# Altium PCB PA6940.PcbDoc
Units mm, origin at the board's own origin, x right, y up, seen from the top; angles counter-clockwise.
Board outline 34.99 x 16 mm, 2 copper layers (Top Layer, Bottom Layer), stack 1.57 mm thick; 7 components, 10 nets, 38 pads, 75 vias.
Unrouted connection lines stored in the file: 10.
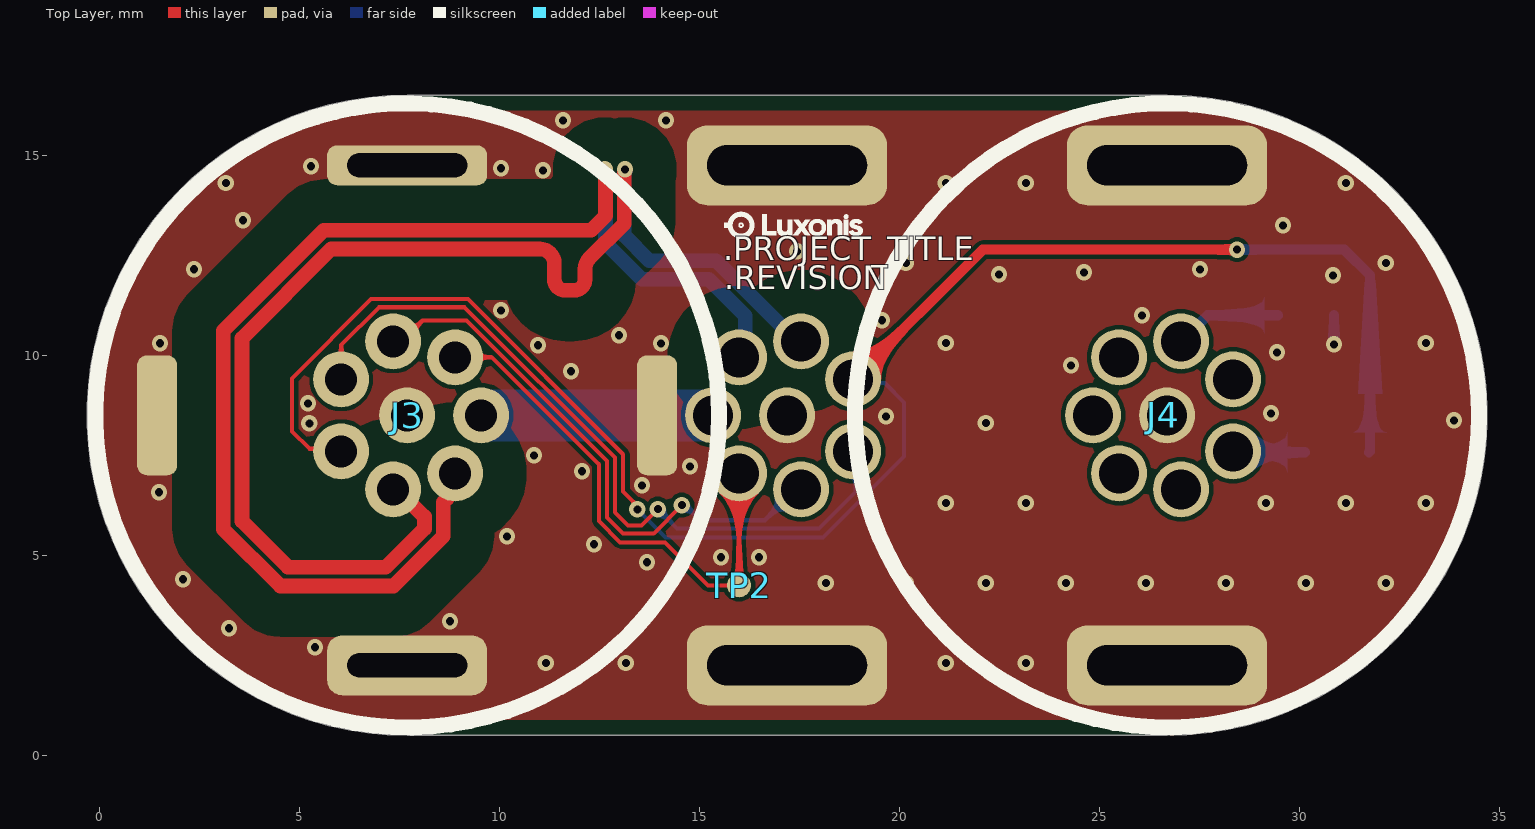
[diagram p0: Top Layer view]
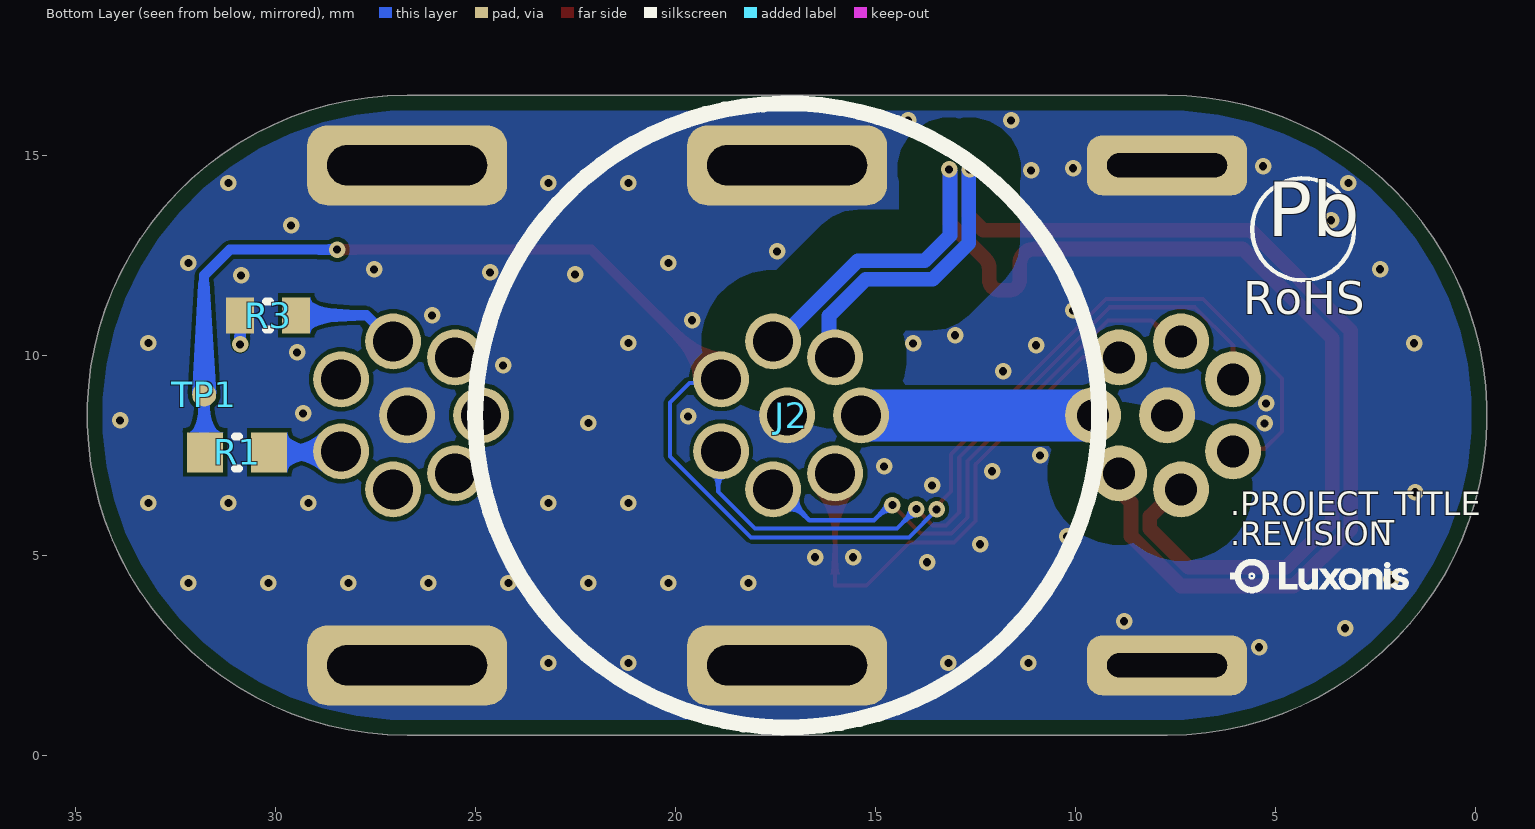
[diagram p1: Bottom Layer view, seen from below]

## Layer stack, top to bottom
Top Solder: solder mask 0.0254, SM-001, Dk 4
Top Layer: signal copper 0.035
Dielectric 1: core 1.5, Core-043, Dk 4.3
Bottom Layer: signal copper 0.035
Bottom Solder: solder mask 0.0254, SM-001, Dk 4

## Board outline
7.703,0.5 cw(c7.703,8.5) 7.703,16.5 26.7,16.5 cw(c26.7,8.5) 26.7,0.5

## Design rules (kind name [scope] priority, off if disabled: settings)
AssemblyTestPointUsage [All] p1: valid=2
AssemblyTestpoint [(IsPad And (OnTopLayer Or OnBottomLayer)) Or (IsVia) Or (IsPad And OnMultiLayer)] p1: testpointundercomponent=FALSE minsize=0.381 maxsize=2.54 preferedsize=1.524 minholesize=0 maxholesize=2.54 preferedholesize=0.813 testpointgrid=0.025 usegrid=FALSE gridtolerance=0 allowsidebottom=TRUE
BoardOutlineClearance [not InPolygonClass('ToEdge')] p1: gap=0.381 ignorepadtopadclearanceinfootprint=FALSE
Clearance DIFF_PAIR_GND [InPolygon vs InAnyDifferentialPair] p1: gap=1.08 ignorepadtopadclearanceinfootprint=FALSE
Clearance [All] p2: gap=0.1 ignorepadtopadclearanceinfootprint=FALSE
ComponentClearance [HasFootprint('FIDUCIAL_ROUND_1MM') or HasFootprint('TP100_200_NS') vs HasFootprint('FIDUCIAL_ROUND_1MM') or HasFootprint('TP100_200_NS')] p1: gap=-0.003 collisioncheckmode=3 verticalgap=2540 showdistances=FALSE
DiffPairsRouting 90ohm [InDifferentialPair('USB_D')] p1: maxlimit=0.1 minlimit=0.1 mostfreqgap=0.1 toplayer_minwidth=0.366 toplayer_maxwidth=0.366 toplayer_prefwidth=0.366 bottomlayer_minwidth=0.366 bottomlayer_maxwidth=0.366 bottomlayer_prefwidth=0.366 impedanceprofiledriven=TRUE impedanceprofileid={4F08DFFA-C90D-4D92-B63A-58C89057396F} impedanceprofilevalue=90.000000 maxuncoupledlength=12.7
DiffPairsRouting 100ohm [InDifferentialPairClass('100ohm')] p2: maxlimit=0.11 minlimit=0.11 mostfreqgap=0.11 toplayer_minwidth=0.173 toplayer_maxwidth=0.173 toplayer_prefwidth=0.173 bottomlayer_minwidth=0.173 bottomlayer_maxwidth=0.173 bottomlayer_prefwidth=0.173 maxuncoupledlength=12.7
FabricationTestPointUsage [All] p1: valid=2 allowmultiple=TRUE
FabricationTestpoint [(IsPad And (OnTopLayer Or OnBottomLayer)) Or (IsVia) Or (IsPad And OnMultiLayer)] p1: side=3 testpointundercomponent=TRUE minsize=0.508 maxsize=2.54 preferedsize=1.524 minholesize=0 maxholesize=1.016 preferedholesize=0.813 testpointgrid=0.025 allowsidetop=TRUE allowsidebottom=TRUE usegrid=FALSE gridtolerance=0
HoleSize [All] p1: absolutevalues=TRUE maxlimit=25.4 minlimit=0.2 maxpercent=80.000 minpercent=20.000
HoleToHoleClearance [All] p1: gap=0.254 allowstackedmicrovias=FALSE
MatchedLengths "Schematic Matched Net Lengths" [InNetClass('USB')] p1: tolerance=25.4 checknetsindiffpair=FALSE checkdiffpairvsdiffpair=TRUE checkxsignals=TRUE checkothers=TRUE usedelayunits=TRUE delaytolerance=1.000000
MatchedLengths DIFF-pairs [InDifferentialPairClass('All Differential Pairs')] p2: tolerance=0.635 checknetsindiffpair=TRUE checkdiffpairvsdiffpair=FALSE checkxsignals=FALSE checkothers=FALSE
MatchedLengths MIPI [InNetClass('SENSORMIPI')] p3: tolerance=25.4 checknetsindiffpair=FALSE checkdiffpairvsdiffpair=TRUE checkxsignals=TRUE checkothers=TRUE usedelayunits=TRUE delaytolerance=1.000000
MinimumSolderMaskSliver [not (HasFootprint('DF40HC-3.0-100DS-0.4V_minpad') or HasFootprint('TPD4E02B04DQAR') or HasFootprint('105450-0101'))] p1: minsoldermaskwidth=0.076
PolygonConnect [All] p1: thpad.connectstyle=Direct thpad.reliefconductorwidth=0.254 thpad.reliefentries=4 thpad.polygonreliefangle="90 Angle" thpad.airgapwidth=0.254 smdpad.connectstyle=Relief smdpad.reliefconductorwidth=0.254 smdpad.reliefentries=4 smdpad.polygonreliefangle="90 Angle" smdpad.airgapwidth=0.254 via.connectstyle=Direct via.reliefconductorwidth=0.254 via.reliefentries=4 via.polygonreliefangle="90 Angle" via.airgapwidth=0.254
RoutingVias RoutingVias_Diff [InDifferentialPairClass('All Differential Pairs')] p1: holewidth=0.254 width=0.508 viastyle="Through Hole" minholewidth=0.2 minwidth=0.4 maxholewidth=25.4 maxwidth=25.4 useviatemplates=TRUE viatemplateguid#1={ACCFCD4B-B46F-49C8-88C0-BB7C3FDCF5E3} viatemplatename#1=v41h20m0mx0
RoutingVias [All] p2: holewidth=0.254 width=0.508 viastyle="Through Hole" minholewidth=0.2 minwidth=0.4 maxholewidth=25.4 maxwidth=25.4 useviatemplates=TRUE viatemplateguid#1={ACCFCD4B-B46F-49C8-88C0-BB7C3FDCF5E3} viatemplatename#1=v41h20m0mx0
SilkToSilkClearance [All] p1: silktosilkclearance=0.025
SilkToSolderMaskClearance [InPadClass('All Pads')] p1: minsilkscreentomaskgap=0 clearancetoexposedcopper=FALSE
SolderMaskExpansion [All] p1: expansion=0.102 istentingtop=FALSE
UnRoutedNet [All] p1: checkbadconnections=TRUE
Width [All] p1: maxlimit=10 minlimit=0.102 preferedwidth=0.254 minimp=50.000000 maximp=50.000000 favimp=50.000000
18 further rules are at their usual default settings.

## Classes and differential pairs
net class USB: USB_D_N USB_D_P
differential pair USB_D: +USB_D_P -USB_D_N

## Components (designator, comment, footprint, x,y, rotation, side; value= is the part's Value field where it differs from the comment)
J2 "1424236" 1424236 17.2,8.5 r270 bottom locked
J3 "08-3203-08-xxx" 08-3203-08-XXX 7.703,8.5 r270 top locked
J4 "1424236" 1424236 26.7,8.5 r90 top locked
R1 "CRCW060310R0FKEA" RESC0603(1608)_N 30.95,7.575 r180 bottom value=10
R3 "RC0603FR-07220RL" RESC0603(1608)_L 30.175,11 r180 bottom value=220
TP1 "TPAD6R" TP06R 31.775,9.017 r270 bottom
TP2 "TPAD6R" TP06R 16,4.25 r270 top

## Footprints (in the part's own frame and the unit in brackets; to place one, negate y for a bottom-side part, rotate by r counter-clockwise, add the part's x,y. Pads: shape width x height; smd on the part's side, far side on the other; paste and mask are expansions set on the pad)
08-3203-08-XXX [mm]
  round 1.4 hole 0.8 paste-10 mask+0.05: 1(-0.9,-1.65) 2(0.9,-1.65) 3(1.85,-0.35) 4(1.45,1.2) 5(0,1.85) 6(-1.45,1.2) 7(-1.85,-0.35) 8(0,0)
  rrect50% 3x1 smd paste-10 mask+0.05: 9(0,6.25) 11(0,-6.25)
  rrect50% 1.5x4 hole 0.6 slot 3 at 90 deg paste-10 mask+0.05: 10(6.25,0)
  rrect50% 1x4 / inner rrect50% 1.5x4 / far side rrect50% 1.5x4 hole 0.6 slot 3 at 90 deg paste-10 mask+0.05: 12(-6.25,0)
  silkscreen extent -7.8,-7.8 7.8,7.8, body extent -6.4,-6.4 6.4,6.4, height 15.53
1424236 [mm]
  round 1.4 hole 1 paste-10 mask+0.05: 1(-0.9,-1.65) 2(0.9,-1.65) 3(1.85,-0.35) 4(1.45,1.2) 5(0,1.85) 6(-1.45,1.2) 7(-1.85,-0.35) 8(0,0)
  rrect50% 2x5 hole 1 slot 4 at 90 deg paste-10 mask+0.05: 9(6.25,0) 10(-6.25,0)
  silkscreen extent -7.8,-7.8 7.8,7.8, body extent -6.4,-6.4 6.4,6.4, height 17.2
RESC0603(1608)_L [mm] "Chip Resistor, Body 1.6x0.8mm, IPC High Density"
  rect 0.7x0.9 smd: 1(-0.7,0) 2(0.7,0)
  silkscreen extent -0.05,-0.35 0.05,0.35, body extent -0.85,-0.47 0.85,0.47, height 0.6
RESC0603(1608)_N [mm] "Chip Resistor, Body 1.6x0.8mm, IPC Medium Density"
  rect 0.9x1 smd: 1(-0.8,0) 2(0.8,0)
  silkscreen extent -0.05,-0.4 0.05,0.4, body extent -0.85,-0.47 0.85,0.47, height 0.6
TP06R [mm] "Testpoint, round, d=0.6mm"
  round 0.6 smd paste-1: 1(0,0)

## Part data
J2 J4: library part CMP-002-00173-2, "Circular Connector", Manufacturer 1="Phoenix Contact", Category="Circular Connectors", ComponentLink1Description=https://datasheet.ciiva.com:443/pdfs/VipMasterIC/IC/PCON/PCONS25324/PCONS30824-1.pdf?src-supplier=IHS+Markit, ComponentLink1URL=https://datasheet.ciiva.com:443/pdfs/VipMasterIC/IC/PCON/PCONS25324/PCONS30824-1.pdf?src-supplier=IHS+Markit, ComponentLink2Description=https://datasheet.ciiva.com/7315/1424236-7315412.pdf?src-supplier=Digi-Key, ComponentLink2URL=https://datasheet.ciiva.com/7315/1424236-7315412.pdf?src-supplier=Digi-Key, ComponentLink3Description=https://datasheet.ciiva.com/15197/getdatasheetpartid-694612-15197214.pdf?src-supplier=Verical, ComponentLink3URL=https://datasheet.ciiva.com/15197/getdatasheetpartid-694612-15197214.pdf?src-supplier=Verical, ComponentLink4Description=https://datasheet.ciiva.com/29258/715201-da-01-en-sens-akt-einbausteck-8pol-1424236-20st-29258298.pdf?src-supplier=Conrad, ComponentLink4URL=https://datasheet.ciiva.com/29258/715201-da-01-en-sens-akt-einbausteck-8pol-1424236-20st-29258298.pdf?src-supplier=Conrad, Connector Type=Circular, Design Item ID=1424236, Manufacturer Part Number 1=1424236, Manufacturer Series=1424236, Pins=8, Pricing 1="1=28,78000, 10=26,47800, 50=24,46320, 100=23,36940 (USD)", REACH SVHC="No SVHC", RoHS=Yes, RoHS Compliant=Yes, Source=NG6013_R3M2E3.SCHLIB
J3: library part CMP-002-00116-2, "M8 Circular Connector", Manufacturer 1=KingTop, Manufacturer Part Number 1=08-3203-08-XXX, Category="Circular Connectors", ComponentLink1Description=https://datasheet.ciiva.com:443/pdfs/VipMasterIC/IC/PCON/PCON-S-A0001961096/PCON-S-A0001960825-1.pdf?src-supplier=IHS+Markit, ComponentLink1URL=https://datasheet.ciiva.com:443/pdfs/VipMasterIC/IC/PCON/PCON-S-A0001961096/PCON-S-A0001960825-1.pdf?src-supplier=IHS+Markit, ComponentLink2Description=https://datasheet.ciiva.com/29221/1456132-29221494.pdf?src-supplier=Digi-Key, ComponentLink2URL=https://datasheet.ciiva.com/29221/1456132-29221494.pdf?src-supplier=Digi-Key, ComponentLink3Description=https://datasheet.ciiva.com/41451/718258-da-01-de-sens-akt-einbaubuch-6pol-1456132-20-st-41451463.pdf?src-supplier=Conrad, ComponentLink3URL=https://datasheet.ciiva.com/41451/718258-da-01-de-sens-akt-einbaubuch-6pol-1456132-20-st-41451463.pdf?src-supplier=Conrad, Connector Type=Circular, Contact Finish - Mating="NOT SPECIFIED", Design Item ID=08-3203-08-xxx, Pins=8, Pricing 1="1=26,56000, 10=24,43500, 50=22,57600, 100=21,51360, 250=20,18568 (USD)", REACH SVHC="No SVHC", RoHS=Yes, RoHS Compliant=Yes, Source=NG9097.SchLib, Stock 1=11
R1: library part CMP-115-000012-5, "RES SMD 10 OHM 1% 1/10W 0603", Case/Package=0603, Manufacturer 1=Vishay, Max Operating Temperature=155°C, Min Operating Temperature=-55°C, Power Rating=100mW, Temperature Coefficient=100ppm/°C, Tolerance=1%, Voltage Rating=75V, Design Item ID=CRCW060310R0FKEA, Manufacturer Part Number 1=CRCW060310R0FKEA
R3: library part CMP-009-00346-1, "RES SMD 220 OHM 1% 0.1W 0603", Case/Package=0603, Manufacturer 1=Yageo, Power Rating=100mW, Tolerance=1%, Voltage Rating=75V, Manufacturer Part Number 1=RC0603FR-07220RL
TP1 TP2: library part CMP-00028-00002-3, "0.6mm round", Manufacturer Part Number 1=TPAD6R

## Via types
v1: diameter 0.406, hole 0.203, Top Layer to Bottom Layer, tented both sides, 46 vias
v2: diameter 0.41, hole 0.2, Top Layer to Bottom Layer, tented both sides, 29 vias

## Nets (pads, with @x,y where several pads share a name; then routed paths per layer and width w, separated by ;. In a path a pad name is that pad's centre, name@x,y a point inside that pad or via, vN(x,y) a via of type N, cw(c..) or ccw(c..) an arc to the next point about the centre after c; other vN are vias at no path point)
BOOT/WS_5V: J2.2 J3.1 | length 19
  Top Layer w0.102: J3.1 6.053,10.253 7.001,11.201 9.141,11.201 12.898,7.443 12.898,6.076 13.225,5.75 13.565,5.75 v2(13.97,6.155)
  Bottom Layer w0.102: v2(13.97,6.155) 14.45,5.675 18,5.675 18.925,6.6 18.925,7.525 J2.2
FSYNC/SD0_5V: J2.1 J3.2 R1.1 TP1.1 | length 44.6
  Top Layer w0.102: J3.2 5.989,7.665 5.26,7.665 4.825,8.1 4.825,9.425 6.802,11.402 9.224,11.402 13.1,7.527 13.1,6.6 13.355,6.345 13.355,6.337 13.46,6.232 v2(13.46,6.148)
  Top Layer w0.254: J2.1 22.091,12.641 v2(28.45,12.641)
  Bottom Layer w0.102: v2(13.46,6.148) 14.159,5.45 18.1,5.45 20.125,7.475 20.125,8.825 19.643,9.307 18.943,9.307 J2.1
  Bottom Layer w0.254: v2(28.45,12.641) 31.134,12.641 31.775,12 TP1.1 31.775,7.6 R1.1
GND: J2.8 J2.9 J2.10 J3.8 J3.9 J3.10 J3.11 J3.12 J4.8 J4.9 J4.10 R3.1 | length 0.7
  Bottom Layer w0.254: v2(30.875,10.275) R3.1
  other v1: 11.17,2.31 13.17,2.31 21.17,2.31 23.17,2.31 5.4,2.7 3.25,3.175 8.775,3.35 18.17,4.31 20.17,4.31 22.17,4.31 24.17,4.31 26.17,4.31 28.17,4.31 30.17,4.31 32.17,4.31 2.1,4.4 13.7,4.825 15.55,4.95 16.5,4.95 12.375,5.275 10.2,5.474 21.17,6.31 23.17,6.31 29.17,6.31 31.17,6.31 33.17,6.31 1.5,6.575 12.075,7.1 22.17,8.31 11.8,9.6 10.975,10.25 1.525,10.3 21.17,10.31 33.17,10.31 13,10.5 19.575,10.875 2.375,12.15 20.17,12.31 32.17,12.31 3.6,13.375 3.17,14.31 21.17,14.31 23.17,14.31 31.17,14.31 10.05,14.675 5.3,14.725
  other v2: 13.575,6.75 14.775,7.225 10.875,7.5 5.26,8.3 33.875,8.375 19.675,8.475 29.3,8.55 5.225,8.8 24.3,9.75 29.45,10.075 14.05,10.3 26.075,11 10.05,11.125 30.85,12 22.5,12.025 24.625,12.075 27.525,12.15 17.45,12.6 29.6,13.25 11.1,14.625 11.6,15.875 14.175,15.875
GPIO3: J4.3 R3.2 | length 2.7
  Bottom Layer w0.254: J4.3 27.068,10.35 27.718,11 R3.2
GPIO3_5V: J2.3 J3.7 | length 14.2
  Top Layer w0.102: J3.7 7.573,10.35 8.098,10.875 9.182,10.875 12.697,7.36 12.697,5.95 13.096,5.55 13.139,5.55 13.141,5.548 13.649,5.548 13.651,5.55 13.869,5.55 v2(14.572,6.253)
  Bottom Layer w0.102: v2(14.572,6.253) 14.655,6.253 15.032,5.877 16.646,5.877 17.419,6.65 J2.3
NetJ4_1: J4.1 R1.2 | length 1.8
  Bottom Layer w0.254: J4.1 28.375,7.575 R1.2
STRB/SCK_5V: J2.4 J3.6 TP2.1 | length 13.1
  Top Layer w0.102: J3.6 9.821,9.95 12.495,7.276 12.495,5.855 13.025,5.325 14.147,5.325 15.222,4.25 TP2.1 J2.4
USB_D_N: J2.6 J3.4 | length 32.4
  Top Layer w0.366: J3.4 8.705,6.852 8.705,6.422 8.602,6.319 8.602,5.474 7.363,4.234 4.532,4.234 3.109,5.657 3.109,10.618 5.616,13.125 12.3,13.125 12.662,13.487 12.662,14.628 v2(12.64,14.65)
  Bottom Layer w0.366: v2(12.64,14.65) 12.662,14.628 12.662,12.804 13.566,11.9 15.238,11.9 16.154,10.985 16.154,10.104 J2.6
USB_D_P: J2.7 J3.3 | length 32.1
  Top Layer w0.366: J3.3 7.456,6.65 8.136,5.97 8.136,5.667 7.17,4.7 4.725,4.7 3.575,5.85 3.575,10.425 5.809,12.659 10.068,12.659 11.017,12.659 cw(c11.017,12.293) 11.383,12.293 11.383,11.895 ccw(c11.651,11.895) 11.651,11.626 11.881,11.626 ccw(c11.881,11.895) 12.149,11.895 12.149,12.164 cw(c12.515,12.164) 12.257,12.423 13.125,13.291 13.128,13.294 13.128,14.597 13.15,14.619 v2(13.15,14.65)
  Bottom Layer w0.366: v2(13.15,14.65) 13.15,14.619 13.128,14.597 13.128,12.997 13.759,12.366 15.431,12.366 17.447,10.35 J2.7
VBUS: J2.5 J3.5 | length 5.8
  Bottom Layer w1.3: J3.5 J2.5
pads on no net: J4.2 J4.4 J4.5 J4.6 J4.7

## Polygon pours and split planes (outlines as drawn)
GND on Bottom Layer "GND_L02_P006" (solid, pour order 6): 0,2.5 0,14.5 cw(c2.5,14.5) 2.5,17 38.5,17 cw(c38.5,14.5) 41,14.5 41,2.5 cw(c38.5,2.5) 38.5,0 2.5,0 cw(c2.5,2.5)
GND on Top Layer "GND_L01_P002" (solid, pour order 2): 0,2.5 0,14.5 cw(c2.5,14.5) 2.5,17 38.5,17 cw(c38.5,14.5) 41,14.5 41,2.5 cw(c38.5,2.5) 38.5,0 2.5,0 cw(c2.5,2.5)

## Silkscreen, mask and mechanical layers (free items; w line width, h text height)
Top Overlay:
  drawing of 10 lines, arcs and shapes, not listed
  text ".PROJECT_TITLE" at 15.6,12.175 h1
  text ".REVISION" at 15.625,11.45 h1
Bottom Overlay:
  drawing of 11 lines, arcs and shapes, not listed
  text "Pb" at 5.198,12.522 h2.34
  text "RoHS" at 5.8,10.75 h1.4
  text ".PROJECT_TITLE" at 6.125,5.8 h1
  text ".REVISION" at 6.125,5.05 h1
Board:
  the board outline again, w0.025